# Altium PCB PCB1.PcbDoc
Units mil, origin at the board's own origin, x right, y up, seen from the top; angles counter-clockwise.
Board outline 3543.31 x 1771.65 mil, 6 copper layers (Top Layer 1, Layer 1, Top Layer, Bottom Layer, Layer 2, Bottom Layer 1), stack 32.112 mil thick; 2 components, 4 nets, 22 pads, 2 vias.
Unrouted connection lines stored in the file: 2.
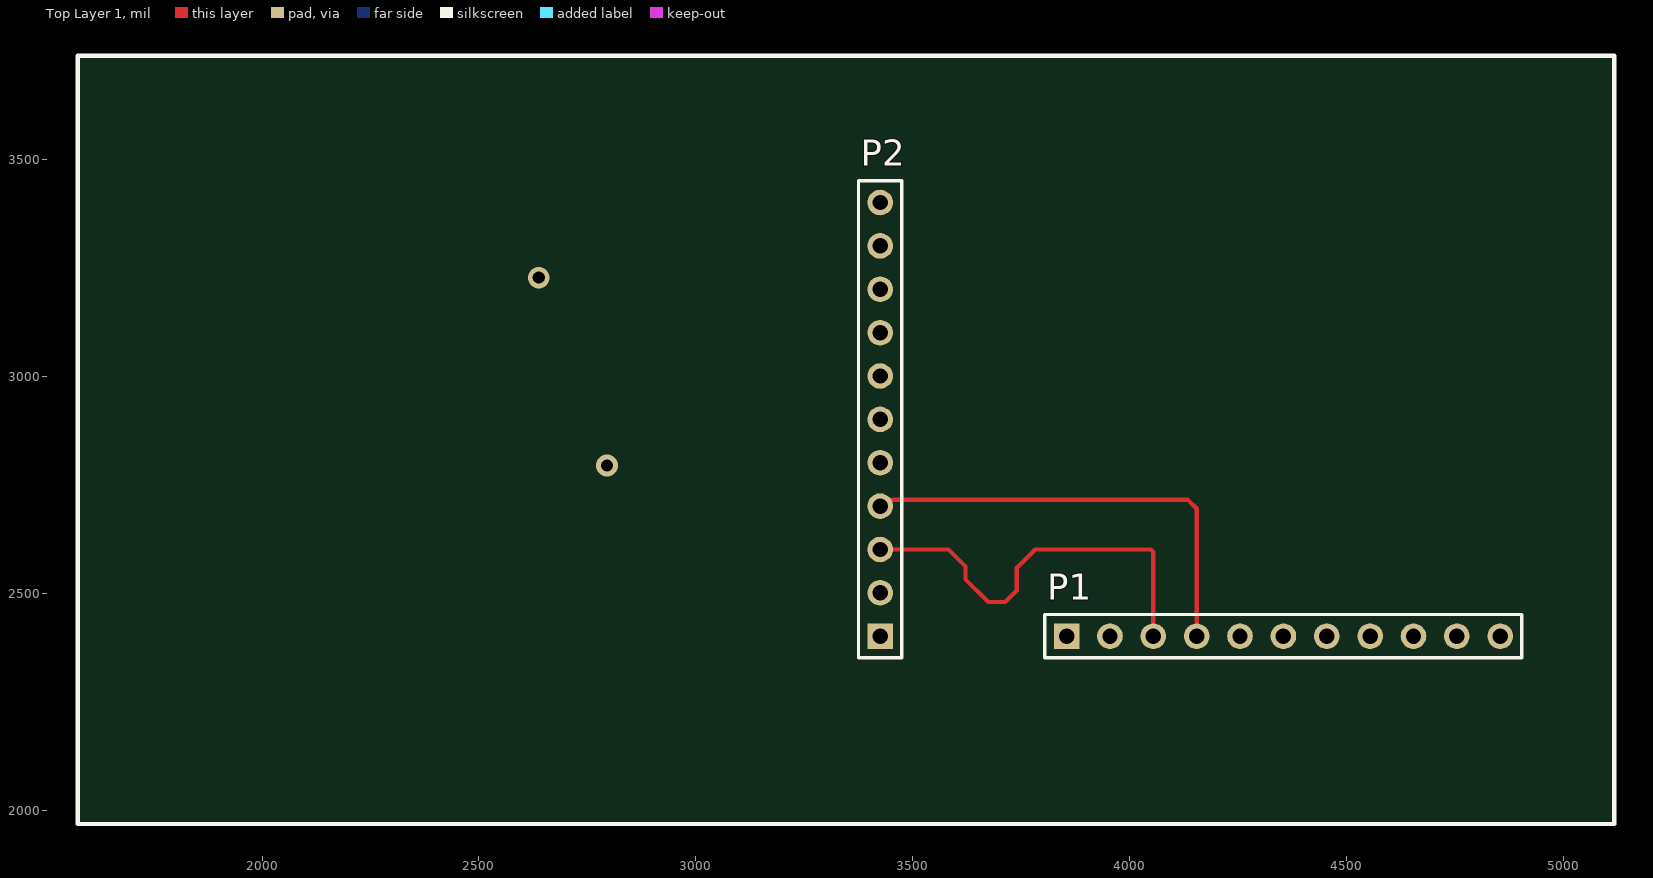
[diagram p0: Top Layer 1 view]
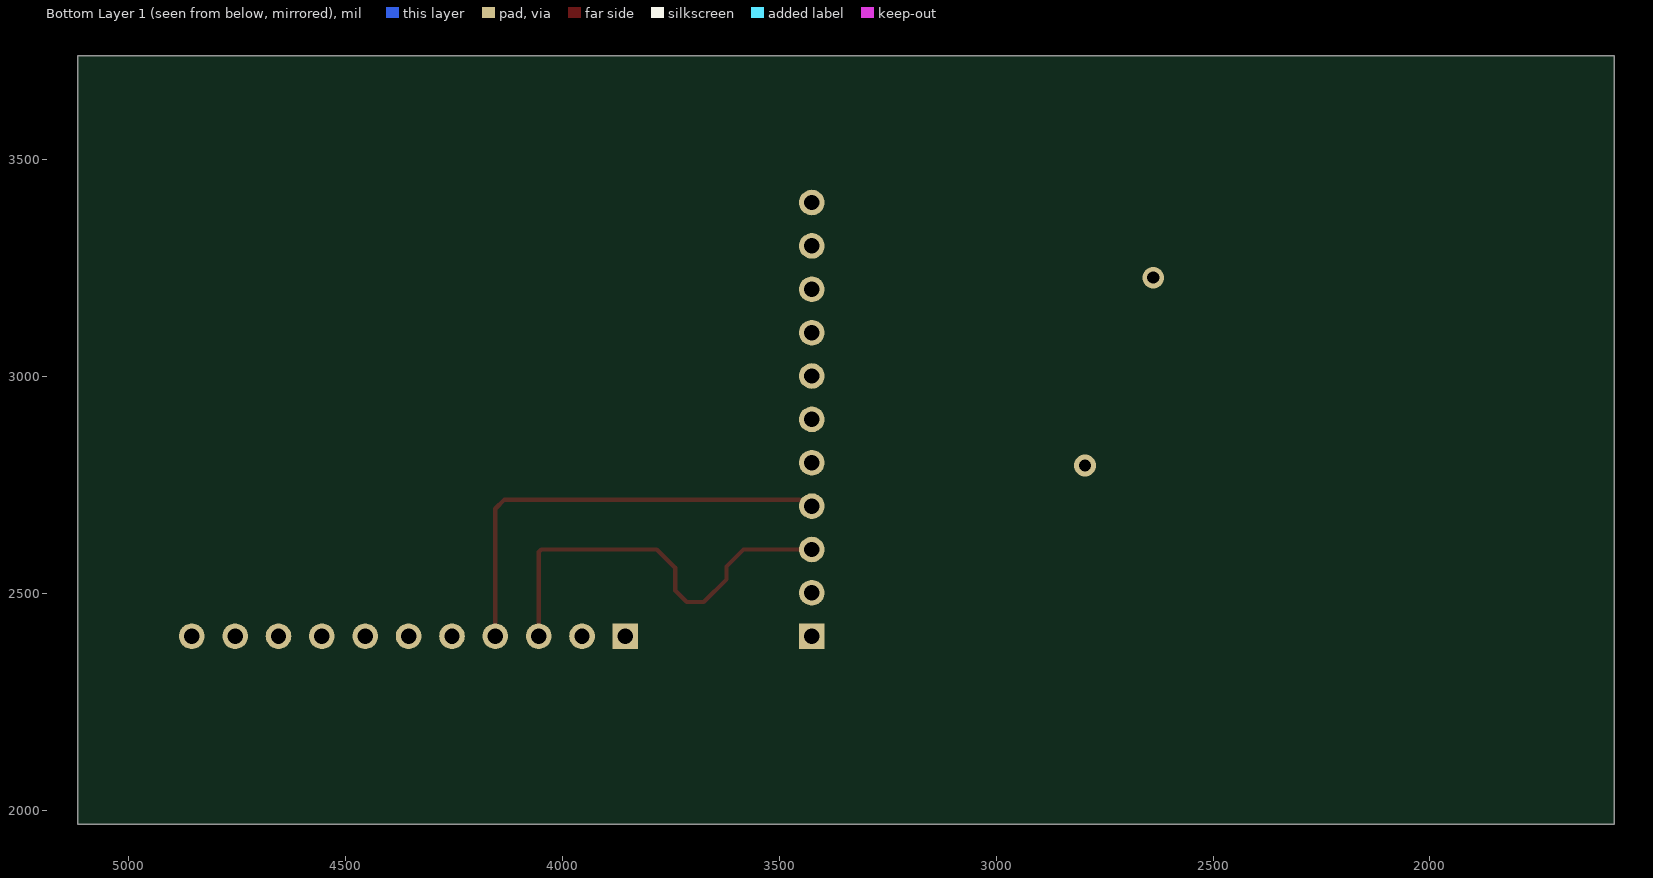
[diagram p1: Bottom Layer 1 view, seen from below]
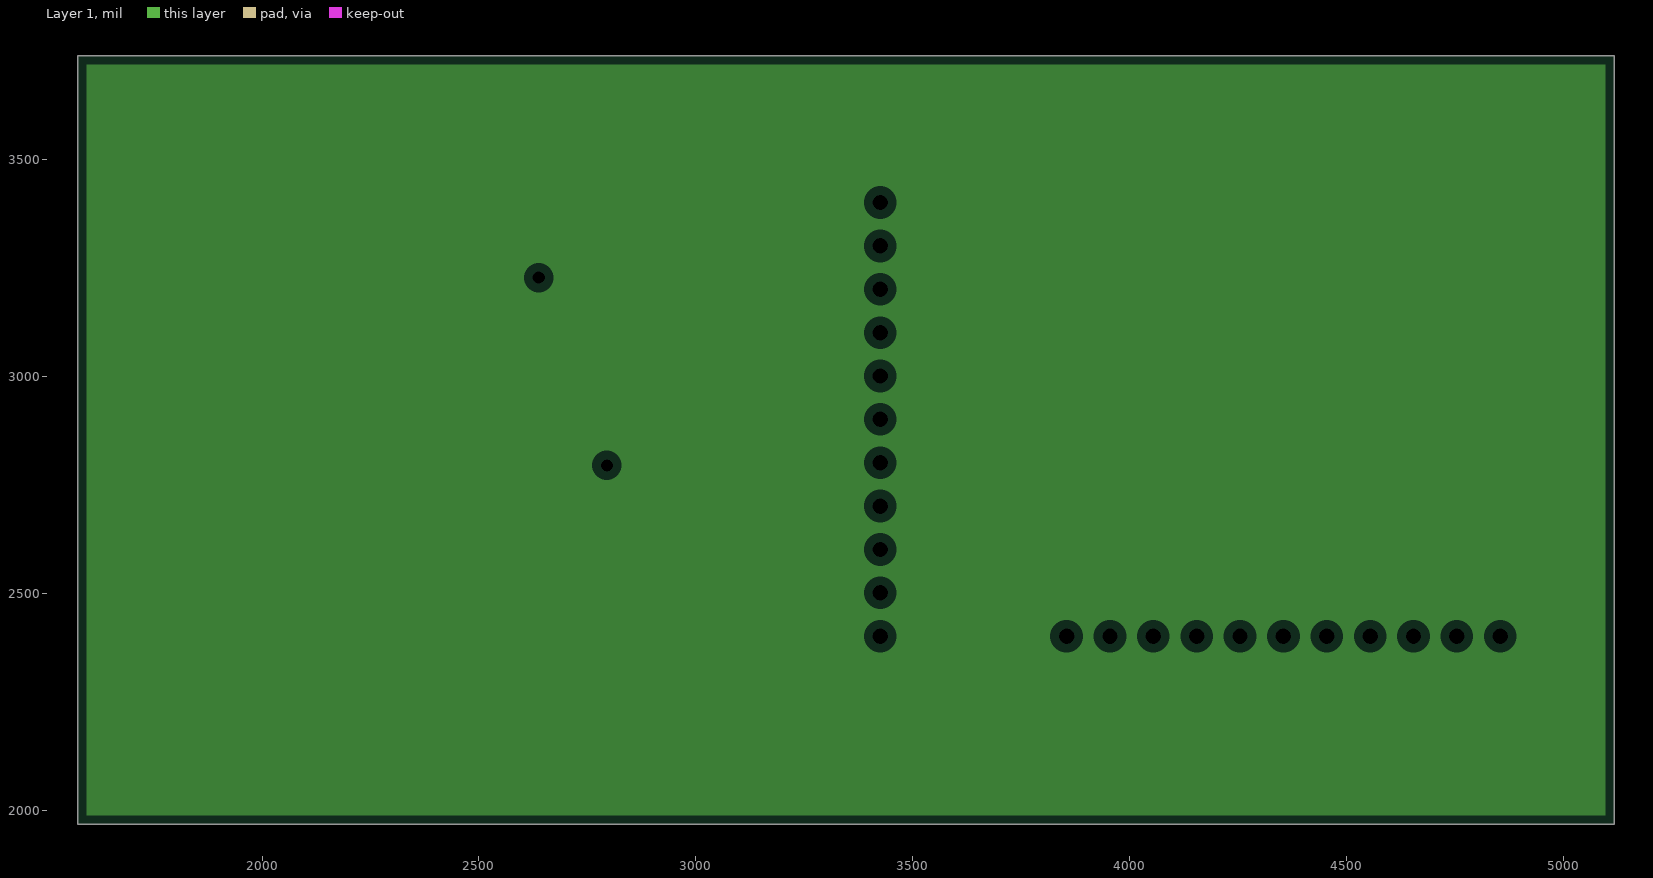
[diagram p2: Layer 1, clearances drawn from the general rule]
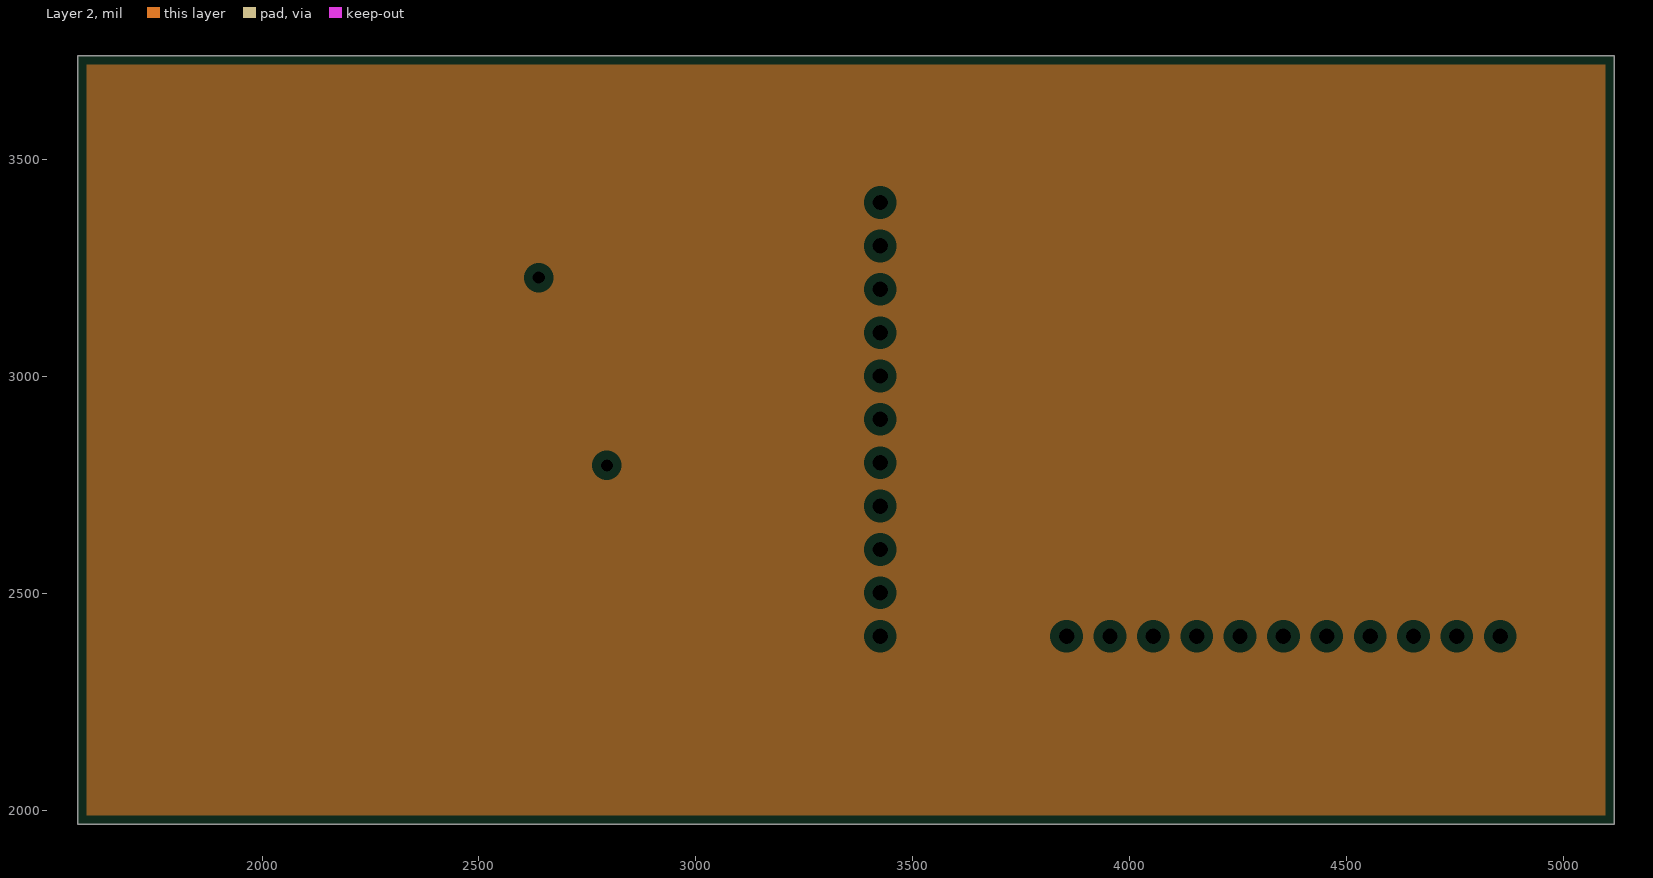
[diagram p3: Layer 2, clearances drawn from the general rule]

## Layer stack, top to bottom
Top Solder: solder mask 0.4, Solder Resist, Dk 3.5
Top Layer 1: signal copper 1.378
Dielectric 2: prepreg 2.8, PP-006, Dk 4.1
Layer 1: plane copper 1.378
Dielectric 4: prepreg 2.8, PP-006, Dk 4.1
Top Layer: signal copper 1.4
Dielectric 1: dielectric 12.6, FR-4, Dk 4.8
Bottom Layer: signal copper 1.4
Dielectric 5: prepreg 2.8, PP-006, Dk 4.1
Layer 2: plane copper 1.378
Dielectric 3: prepreg 2.8, PP-006, Dk 4.1
Bottom Layer 1: signal copper 1.378
Bottom Solder: solder mask 0.4, Solder Resist, Dk 3.5

## Board outline
1574.8,1968.5 1574.8,3740.16 5118.11,3740.16 5118.11,1968.5

## Design rules (kind name [scope] priority, off if disabled: settings)
Clearance [All] p1: gap=10 ignorepadtopadclearanceinfootprint=FALSE except(0: Arc-Hole Track-Hole SMDPad-Hole THPad-Hole Via-Hole Fill-Hole Poly-Hole Region-Hole Text-Hole)
MatchedLengths "Schematic Matched Net Lengths" [InNetClass('len')] p1: tolerance=100 checknetsindiffpair=FALSE checkdiffpairvsdiffpair=TRUE checkxsignals=TRUE checkothers=TRUE
PlaneClearance [All] p1: clearance=20
PlaneConnect [All] p1: planeconnectstyle=Relief reliefexpansion=20 reliefentries=4 reliefconductorwidth=10 reliefairgap=10
PolygonConnect [All] p1: connectstyle=Relief reliefconductorwidth=10 reliefentries=4 polygonreliefangle="90 Angle" airgapwidth=10
RoomDefinition Sheet2 [InComponentClass('Sheet2')] p1: confinementstyle=ConfineIn formatcopy=TRUE lockcomponents=FALSE outline 0,0 2000,0 2000,1000 0,1000
RoutingVias [All] p1: holewidth=28 width=50 viastyle="Through Hole" minholewidth=28 minwidth=50 maxholewidth=28 maxwidth=50
SolderMaskExpansion [All] p1: expansion=4 istentingtop=FALSE
Width [All] p1: maxlimit=10 minlimit=10 preferedwidth=10
28 further rules are at their usual default settings.

## Classes and differential pairs
net class len: P3 P4

## Components (designator, comment, footprint, x,y, rotation, side; value= is the part's Value field where it differs from the comment)
P1 "Header 11" HDR1X11 3855.12,2401.57 r0 top
P2 "Header 11" HDR1X11 3425.2,2401.57 r90 top

## Footprints (in the part's own frame and the unit in brackets; to place one, negate y for a bottom-side part, rotate by r counter-clockwise, add the part's x,y. Pads: shape width x height; smd on the part's side, far side on the other; paste and mask are expansions set on the pad)
HDR1X11 [mm] "Connector; Header; 11 Position"
  rect 1.5x1.5 hole 0.9: 1(0,0)
  round 1.5 hole 0.9: 2(2.54,0) 3(5.08,0) 4(7.62,0) 5(10.16,0) 6(12.7,0) 7(15.24,0) 8(17.78,0) 9(20.32,0) 10(22.86,0) 11(25.4,0)
  silkscreen extent -1.27,-1.27 26.67,1.27

## Part data
P1 P2: "Header, 11-Pin", LatestRevisionDate=17-Jul-2002, LatestRevisionNote="Re-released for DXP Platform.", Publisher="Altium Limited"

## Via types
v1: diameter 50/50/50/50 (per signal layer), hole 28, Top Layer 1 to Bottom Layer 1, 1 vias
v2: diameter 50, hole 28, Top Layer 1 to Bottom Layer 1, 1 vias

## Nets (pads, with @x,y where several pads share a name; then routed paths per layer and width w, separated by ;. In a path a pad name is that pad's centre, name@x,y a point inside that pad or via, vN(x,y) a via of type N, cw(c..) or ccw(c..) an arc to the next point about the centre after c; other vN are vias at no path point)
P1: P1.1 P2.1
P2: P1.2 P2.2
P3: P1.3 P2.3 | length 974.9
  Top Layer 1 w10: P2.3 3582.68,2601.57 3622.05,2562.2 3622.05,2532.53 3674.26,2480.32 3713.63,2480.32 3740.16,2506.84 3740.16,2559.06 3782.68,2601.57 4049.26,2601.57 4055.12,2595.72 P1.3
P4: P1.4 P2.4 | length 1038.6
  Top Layer 1 w10: P2.4 3438.47,2701.57 3453.43,2716.54 4133.86,2716.54 4155.12,2695.28 P1.4
pads on no net: P1.5 P1.6 P1.7 P1.8 P1.9 P1.10 P1.11 P2.5 P2.6 P2.7 P2.8 P2.9 P2.10 P2.11
copper on no net:
  other v1: 2795.28,2795.28
  other v2: 2637.8,3228.35

## Polygon pours and split planes (outlines as drawn)
no net on Layer 1 (split plane): 5098.01,1988.6 1594.9,1988.6 1594.9,3720.06 5098.01,3720.06
no net on Layer 2 (split plane): 5098.01,1988.6 1594.9,1988.6 1594.9,3720.06 5098.01,3720.06

## Silkscreen, mask and mechanical layers (free items; w line width, h text height)
Top Overlay:
  the board outline again, w10

## Dimensions
5118.11,3740.16 to 5118.11,1968.5 on Top Overlay
1574.8,3740.16 to 5118.11,3740.16 on Top Overlay